# Altium PCB l5.pcbdoc
Units mil, origin at the board's own origin, x right, y up, seen from the top; angles counter-clockwise.
Board outline 4660 x 3505 mil, 2 copper layers (Top Layer, Bottom Layer); 4 components, 5 nets, 15 pads, 0 vias.
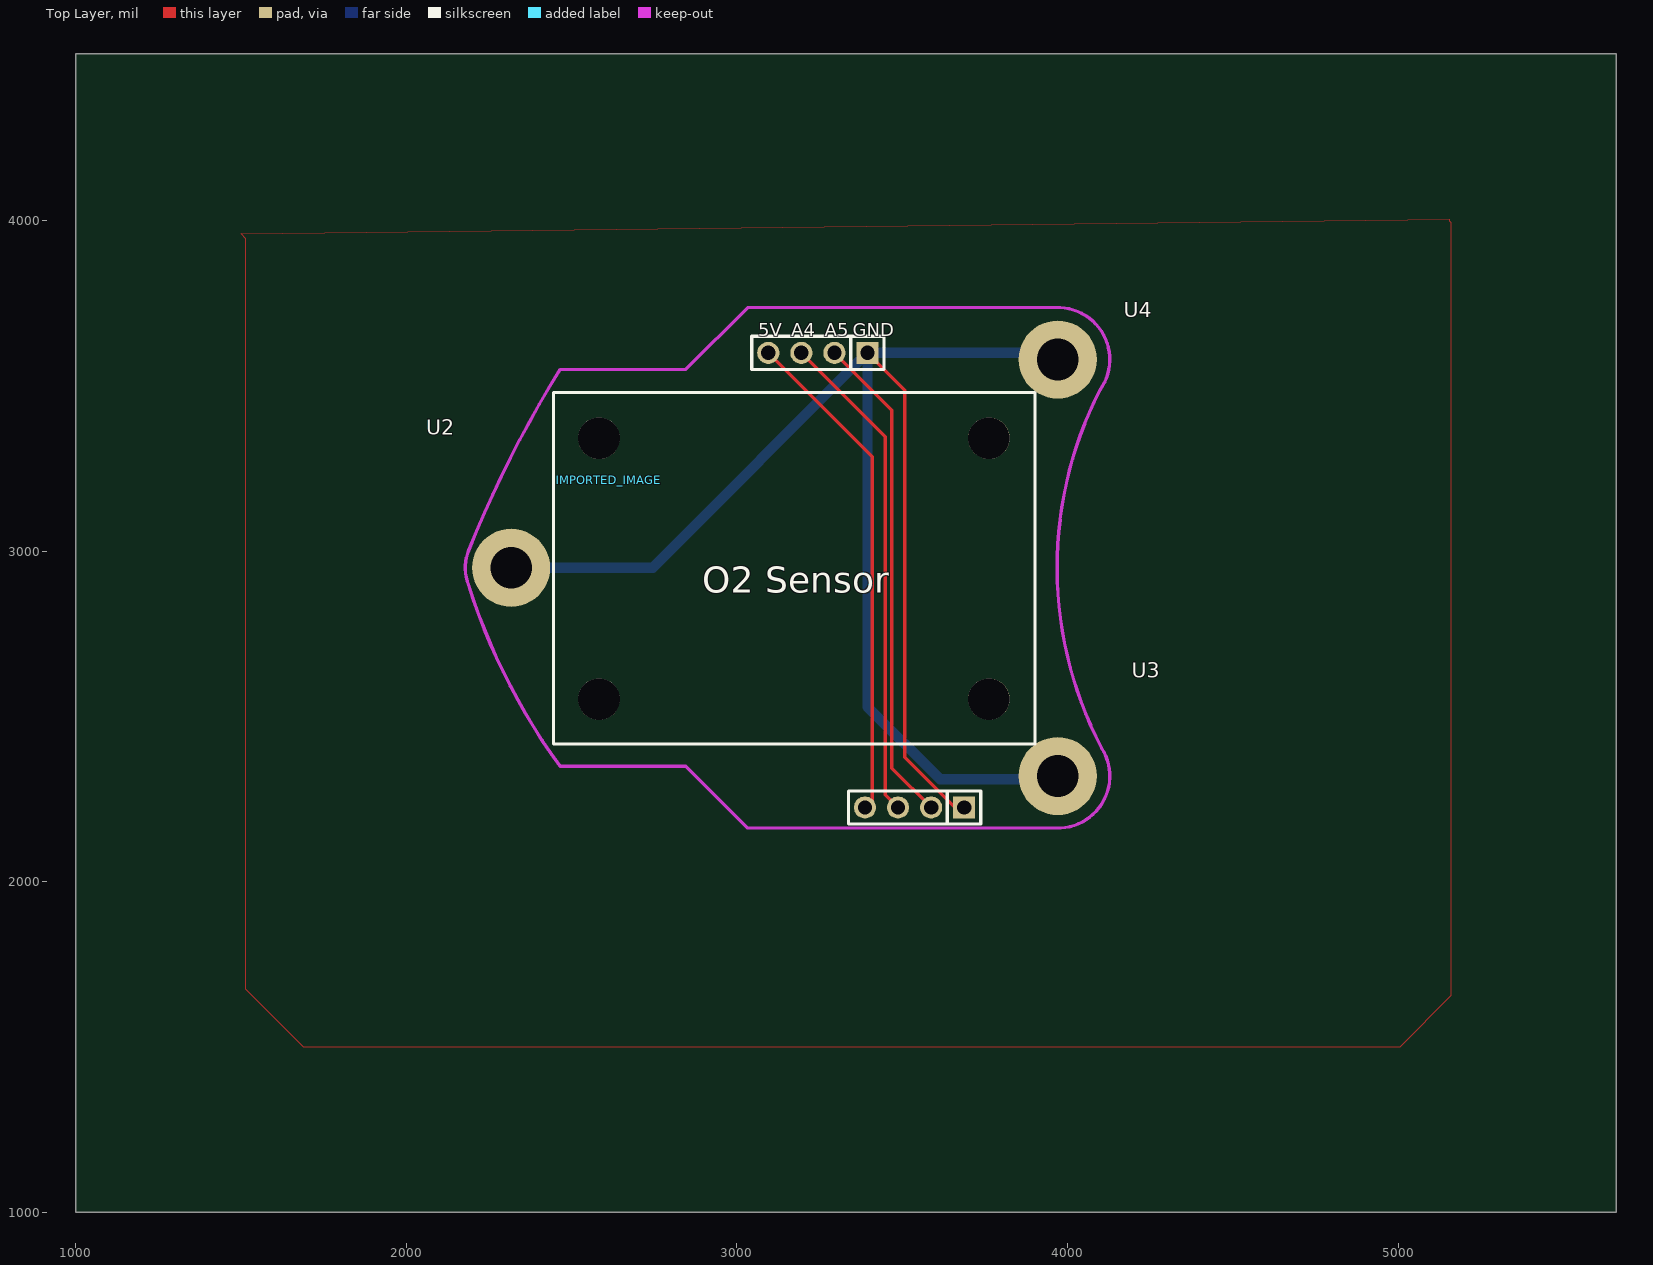
[diagram p0: Top Layer view]
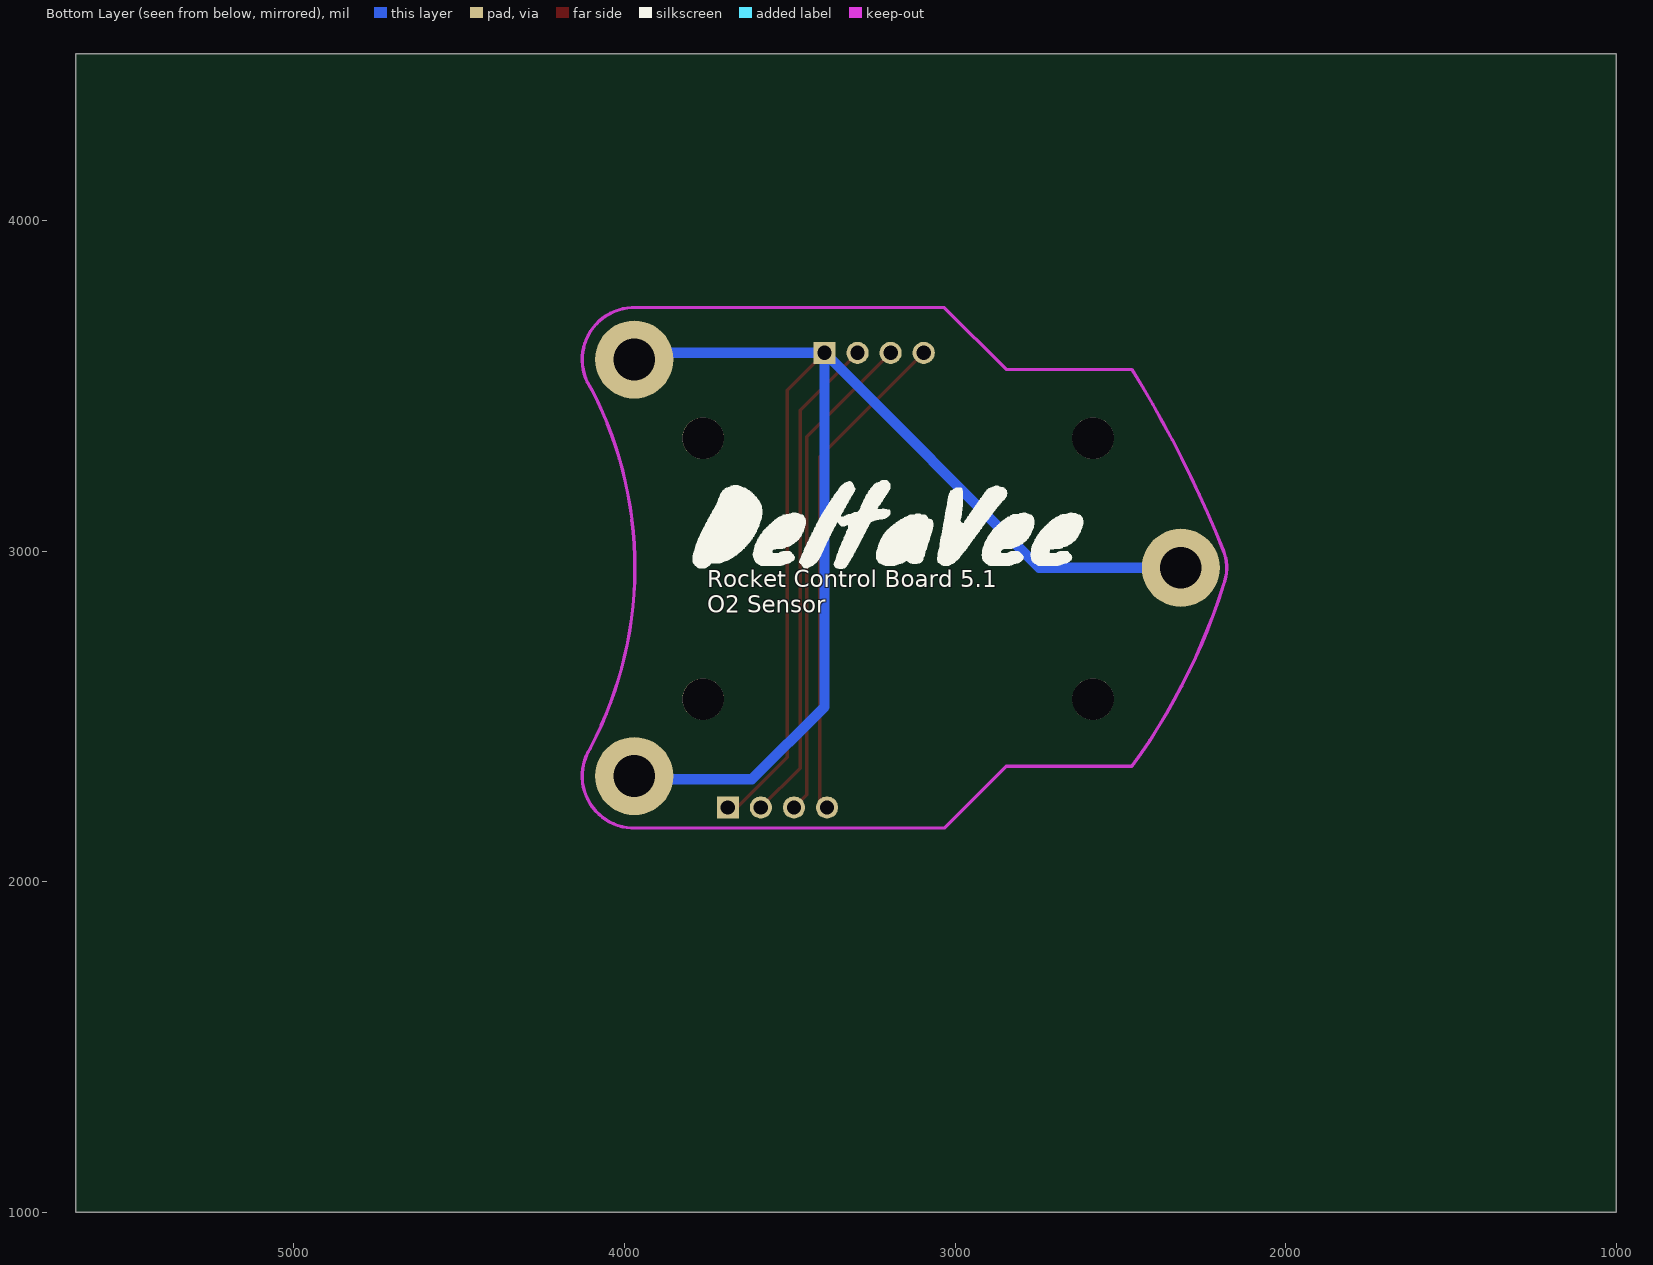
[diagram p1: Bottom Layer view, seen from below]

## Layer stack, top to bottom
Top Layer: signal copper (thickness not stored)
Dielectric: dielectric 12.6, FR-4, Dk 4.8
Bottom Layer: signal copper (thickness not stored)

## Board outline
5660,1000 1000,1000 1000,4505 5660,4505

## Components (designator, comment, footprint, x,y, rotation, side; value= is the part's Value field where it differs from the comment)
IMPORTED_IMAGE "IMPORTED_IMAGE" IMPORTED_IMAGE 2612.98,3215.15 r0 top
U2 "MH_M3" MH_M3_PCB 2316.97,2950 r0 top
U3 "MH_M3" MH_M3_PCB 3970.51,2320.08 r0 top
U4 "MH_M3" MH_M3_PCB 3970.51,3579.92 r0 top

## Footprints (in the part's own frame and the unit in brackets; to place one, negate y for a bottom-side part, rotate by r counter-clockwise, add the part's x,y. Pads: shape width x height; smd on the part's side, far side on the other; paste and mask are expansions set on the pad)
IMPORTED_IMAGE [mil]
MH_M3_PCB [mm]
  round 6 hole 3.2 paste+0 mask+0.051: 1(0,0)

## Free pads (board coordinates)
  rect 66.93x66.93 hole 43.31 paste+0 mask+2: 1(3395,3600) 1(3687.44,2225)
  round 66.93 hole 43.31 paste+0 mask+2: 2(3295,3600) 2(3587.44,2225) 3(3195,3600) 3(3487.44,2225) 4(3095,3600) 4(3387.44,2225)
  round 125.98 hole 125.98 unplated paste+0: ""(2582.8,2552.8) ""(2582.8,3342.2) ""(3762.2,2552.8) ""(3762.2,3342.2)

## Nets (pads, with @x,y where several pads share a name; then routed paths per layer and width w, separated by ;. In a path a pad name is that pad's centre, name@x,y a point inside that pad or via, vN(x,y) a via of type N, cw(c..) or ccw(c..) an arc to the next point about the centre after c; other vN are vias at no path point)
+5V: pad.4 | length 1514.4
  Top Layer w10: pad.4@3095,3600 3409.49,3285.51 3409.49,2247.05 pad.4@3387.44,2225
GND: pad.1 U2.1 U3.1 U4.1 | length 5184.6
  Top Layer w10: pad.1@3395,3600 3507.91,3487.09 3507.91,2376.18 3659.09,2225 pad.1@3687.44,2225
  Bottom Layer w31.5: U2.1 2745,2950 pad.1@3395,3600 ; U3.1 3960.43,2310 3615,2310 3395,2530 pad.1@3395,3600 ; U4.1 3950.43,3600 pad.1@3395,3600
S1: pad.3 | length 1496.1
  Top Layer w10: pad.3@3195,3600 3448.86,3346.14 3448.86,2263.58 pad.3@3487.44,2225
S2: pad.2 | length 1496.1
  Top Layer w10: pad.2@3295,3600 3468.54,3426.46 3468.54,2343.9 pad.2@3587.44,2225
S$525: 

## Polygon pours and split planes (outlines as drawn)
GND on Top Layer (solid): 5155,4005 5155,4000 5160,3995 5160,1655 5005,1500 1690,1500 1515,1675 1515,3945 1500,3960

## Keep-outs
Keep-Out Layer:
  lines w10 net S$525: 2188.91,3003.37 ccw(c2316.97,2950) 2187.88,2899.17 ccw(c3994.07,3466.09) 2465,2350 ; 2188.9,3003.4 cw(c5443.86,1702.28) 2465,3550 ; 3964.73,3737.29 cw(c3970.51,3579.92) 4098.53,3488.21 ccw(c5144.86,2951.02) 4102.9,2405.4 ; 3966.17,2162.66 ccw(c3970.51,2320.08) 4102.86,2405.41

## Silkscreen, mask and mechanical layers (free items; w line width, h text height)
Top Overlay:
  lines w10: 3344.07,3650 3344.07,3550 ; 3636.51,2275 3636.51,2175 ; 3344.07,3550 3045,3550 3045,3650 3445,3650 3445,3550 3344.07,3550 ; 3636.51,2175 3337.44,2175 3337.44,2275 3737.44,2275 3737.44,2175 3636.51,2175 ; 2445,2417.01 3901.69,2417.01 3901.69,3480 2445,3480 2445,2417.01
  text "5V" at 3065,3650.32 h39.37
  text "A4" at 3165,3650.32 h39.37
  text "A5" at 3265,3650.32 h39.37
  text "GND" at 3350,3650.32 h39.37
  text "O2 Sensor" at 2895,2875 h80
Bottom Overlay:
  text "Rocket Control Board 5.1 / O2 Sensor" at 3750,2814.41 h51.18
Document:
  lines w0.1: 3329.99,2752.49 3330.01,2752.51